# EAGLE board humanoid-9 (EAGLE 7.2.0)
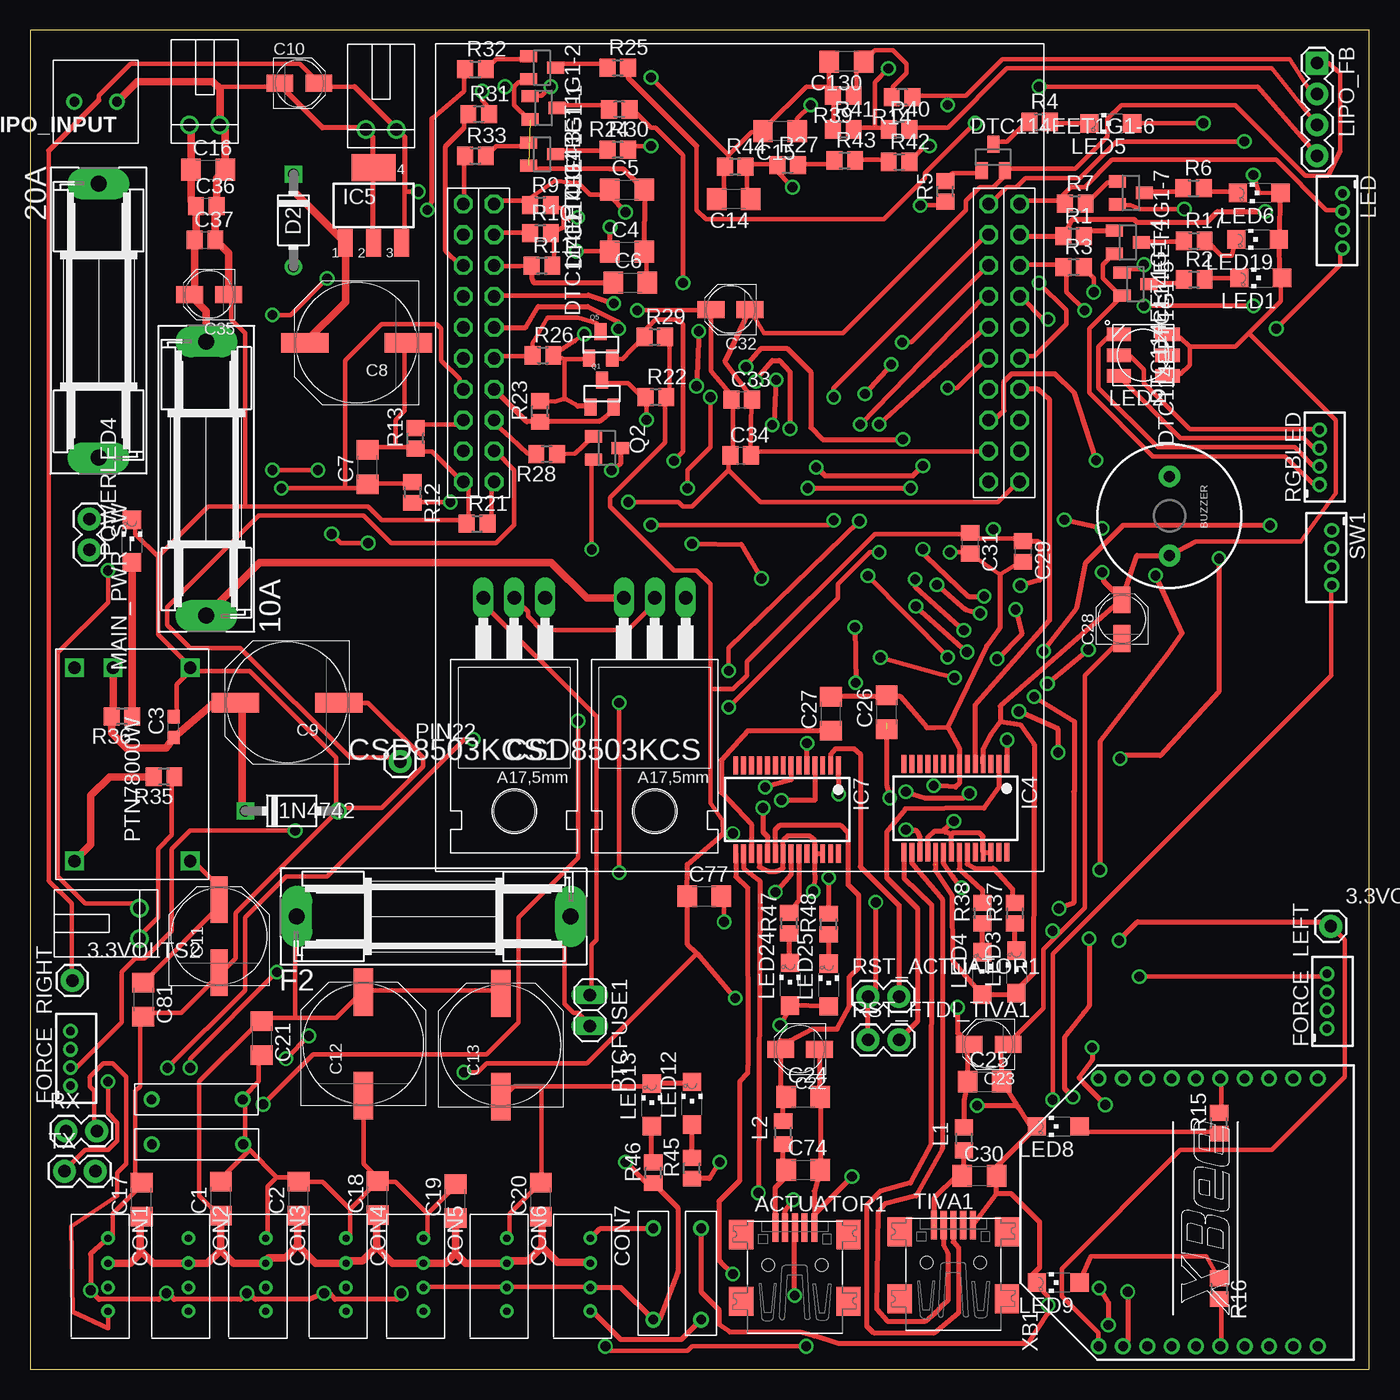
[diagram p0: board, top side]
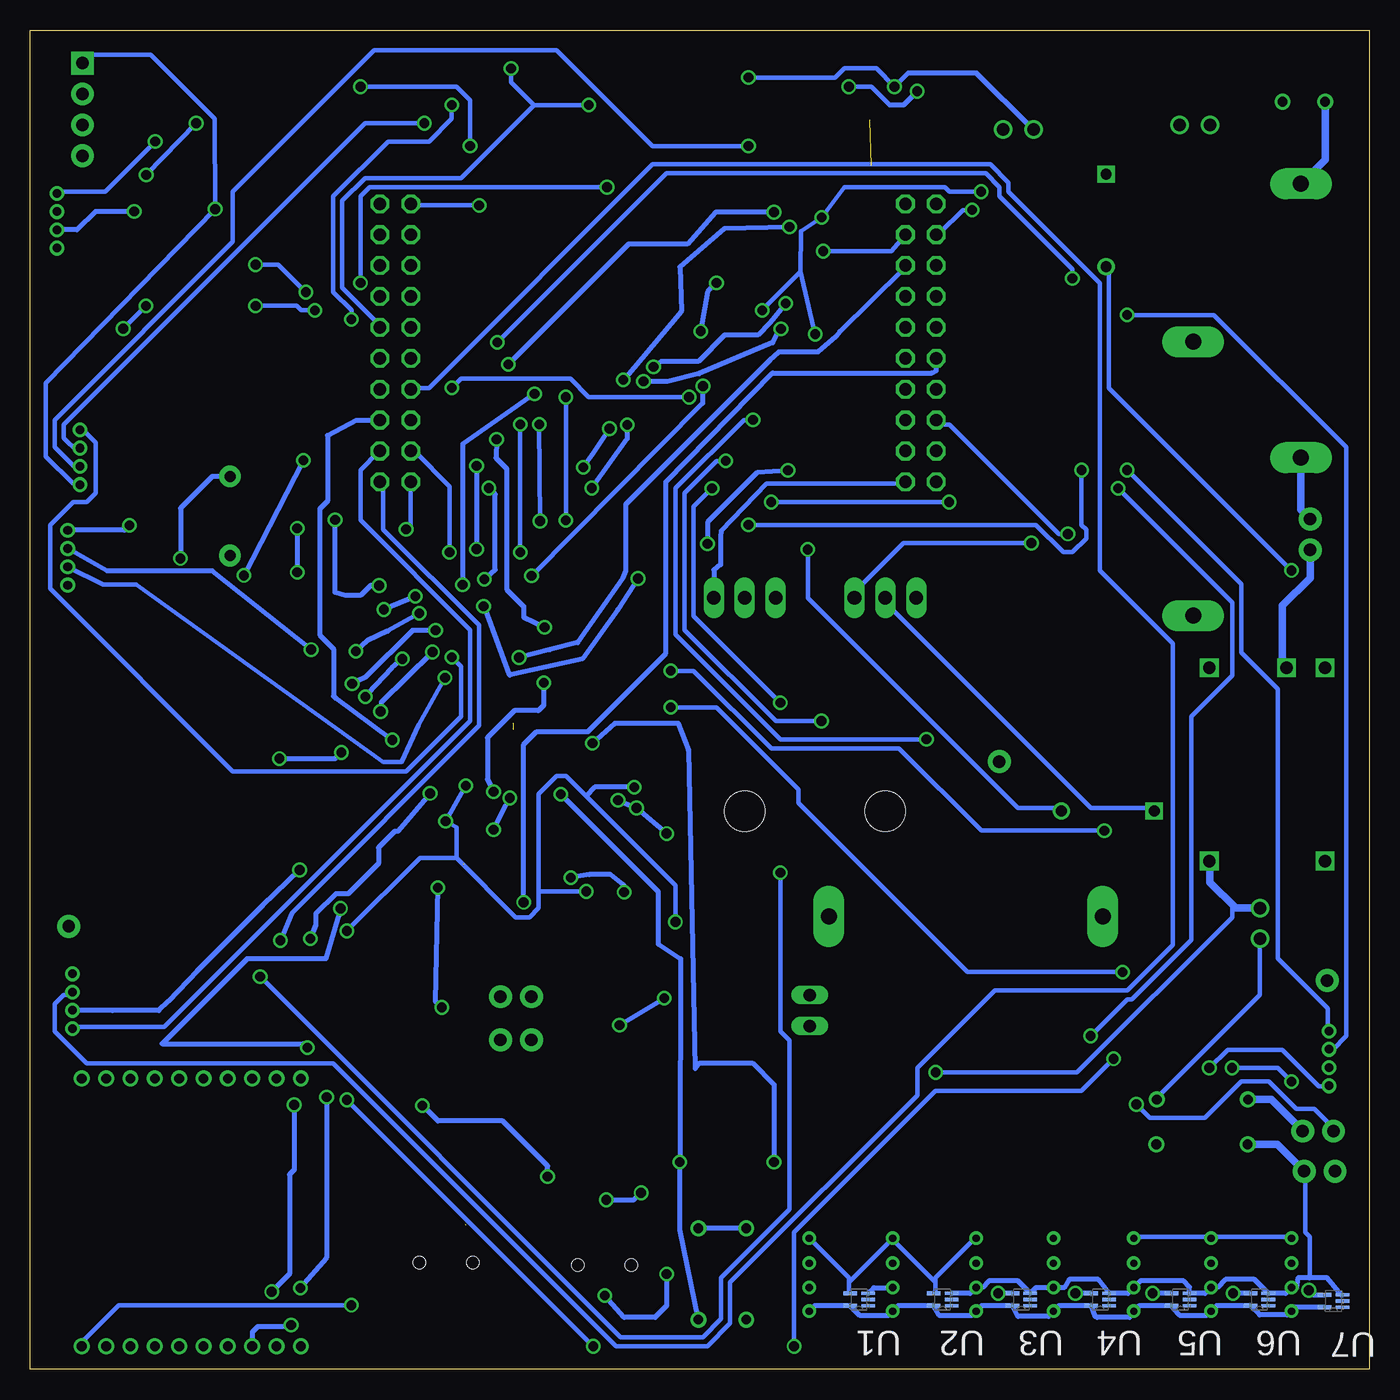
[diagram p1: board, bottom side, seen from below]

Size 110 x 110 mm. Coordinates in mm from the lower left corner, seen from the top.
Outline: 0,0 110,0 110,110 0,110 0,0
Copper layers (1*16): Top 0.035mm / dielectric 1.5mm / Bottom 0.035mm
Design rules "default *": minimum track width 10mil, minimum drill 0.5mm, track to track 0.4mm, track to pad 8mil, pad to pad 8mil, via to via 8mil, smd to smd 8mil, copper to edge 40mil, drill to drill 8mil, minimum pad ring 10mil, minimum via ring 8mil, stop-mask expansion 4mil, vias tented up to drill 0mil, thermal gap 10mil
Net classes: 0 default: width 0.35 mm

## Footprints (pad centres in the part's own frame; a part is rotated, then mirrored left to right if it is on the bottom)
DO41-3 = drill 0.9: A 3.81,0 | drill 0.9 square: C -3.81,0
2PINRIGHT = drill 1.02: P$1 0,0; P$2 2.5,0
1X01 = drill 1.016 pad 1.88: 1 0,0
SH22,5 = drill 1.321 pad 2.54 long: 1 -11.252,0; 2 11.252,0
USB-MINIB = smd 0.5 x 2.308: D+ 0,4.064; D- -0.8,4.064; GND 1.6,4.064; ID 0.8,4.064; VBUS -1.6,4.064 | smd 2 x 2.4: GND1 -4.4,-2; GND2 -4.4,3.5; GND3 4.4,3.5; GND4 4.4,-2 | hole 1: -2.2,1; 2.2,1
BUZZER-12MM = drill 0.9 pad 1.778: + 3.25,0; - -3.25,0
C1206 = smd 1.6 x 1.8: 1 -1.4,0; 2 1.4,0
C1608 = smd 1.1 x 1: 1 -0.85,0; 2 0.85,0
PANASONIC_G = smd 3.9 x 1.6: + 4.25,0; - -4.25,0
PANASONIC_B = smd 2.2 x 1.4: + 1.6,0; - -1.6,0
PANASONIC_E = smd 3.8 x 1.4: + 3,0; - -3,0
C0805 = smd 1.3 x 1.5: 1 -0.85,0; 2 0.85,0
B4B-ZR = drill 0.6: 1 7.95,-1.75; 2 6,-1.75; 3 4,-1.75; 4 1.95,-1.75
TO220 = drill 1.118 long: 1 -2.54,-6.35; 2 0,-6.35; 3 2.54,-6.35 | hole 3.302: 0,11.176
SOT23 = smd 1 x 1.4: 1 -0.95,-1.1; 2 0.95,-1.1; 3 0,1.1
B4B-ZR' = drill 0.7 pad 1.1: 1 -2.25,0; 2 -0.75,0; 3 0.75,0; 4 2.25,0
SSOP28 = smd 0.4 x 1.5: 1 -4.225,-3.625; 2 -3.575,-3.625; 3 -2.925,-3.625; 4 -2.275,-3.625; 5 -1.625,-3.625; 6 -0.975,-3.625; 7 -0.325,-3.625; 8 0.325,-3.625; 9 0.975,-3.625; 10 1.625,-3.625; 11 2.275,-3.625; 12 2.925,-3.625; 13 3.575,-3.625; 14 4.225,-3.625; 15 4.225,3.625; 16 3.575,3.625; 17 2.925,3.625; 18 2.275,3.625; 19 1.625,3.625; 20 0.975,3.625; 21 0.325,3.625; 22 -0.325,3.625; 23 -0.975,3.625; 24 -1.625,3.625; 25 -2.275,3.625; 26 -2.925,3.625; 27 -3.575,3.625; 28 -4.225,3.625
SOT223 = smd 1.219 x 2.235: 1 -2.311,-3.099; 2 0,-3.099; 3 2.311,-3.099 | smd 3.6 x 2.2: 4 0,3.099
L0805 = smd 1.3 x 1.5: 1 -0.95,0; 2 0.95,0
CHIPLED_1206 = smd 1.5 x 1.5: A 0,-1.75; C 0,1.75
RGBLED5050 = smd 2 x 1.1: 1 -2,1.7; 2 -2,0; 3 -2,-1.7; 4 2,-1.7; 5 2,0; 6 2,1.7
1X04 = drill 1.016 pad 1.88 square: 1 0,0 | drill 1.016 pad 1.88: 2 2.54,0; 3 5.08,0; 4 7.62,0
ED350V-02P = drill 0.8: P$1 0,0; P$2 3.5,0
1X02 = drill 1.016 pad 1.88: 1 0,0; 2 2.54,0
1X02' = drill 1.016 long: 1 -1.27,0; 2 1.27,0
R0805 = smd 1.3 x 1.5: 1 -0.85,0; 2 0.85,0
SOT50P160X60-5N = smd 1.118 x 0.254: 1 -0.737,0.508; 2 -0.737,0; 3 -0.737,-0.508 | smd 1.118 x 0.305: 4 0.737,-0.508; 5 0.737,0.508
TIVA = drill 1.02 octagon: P$1 0,0; P$2 2.54,0; P$3 5.08,0; P$4 7.62,0; P$5 10.16,0; P$6 12.7,0; P$7 15.24,0; P$8 17.78,0; P$9 20.32,0; P$10 22.86,0; P$11 0,2.54; P$12 2.54,2.54; P$13 5.08,2.54; P$14 7.62,2.54; P$15 10.16,2.54; P$16 12.7,2.54; P$17 15.24,2.54; P$18 17.78,2.54; P$19 20.32,2.54; P$20 22.86,2.54; P$21 0,43.18; P$22 2.54,43.18; P$23 5.08,43.18; P$24 7.62,43.18; P$25 10.16,43.18; P$26 12.7,43.18; P$27 15.24,43.18; P$28 17.78,43.18; P$29 20.32,43.18; P$30 22.86,43.18; P$31 0,45.72; P$32 2.54,45.72; P$33 5.08,45.72; P$34 7.62,45.72; P$35 10.16,45.72; P$36 12.7,45.72; P$37 15.24,45.72; P$38 17.78,45.72; P$39 20.32,45.72; P$40 22.86,45.72
PTN78000W = drill 1.02 square: P1 1.52,11.045; P2 1.52,4.705; P3 1.52,1.525; P4 17.4,1.52; P5 17.4,11.045
V18ZA2P = drill 0.8: P$1 0,0; P$2 7.5,0
XBEE = drill 0.8 pad 1.27: 1 -11,9; 2 -11,7; 3 -11,5; 4 -11,3; 5 -11,1; 6 -11,-1; 7 -11,-3; 8 -11,-5; 9 -11,-7; 10 -11,-9; 11 11,-9; 12 11,-7; 13 11,-5; 14 11,-3; 15 11,-1; 16 11,1; 17 11,3; 18 11,5; 19 11,7; 20 11,9

## Placement (x,y rotation side)
1N4742  [DO41-3]  21.47,45.87 0 top
3.3V1  2PINRIGHT  [2PINRIGHT]  27.56,101.85 0 top
3.3VOLTS1  M01PTH  [1X01]  106.86,36.39 0 top
3.3VOLTS2  M01PTH  [1X01]  3.45,31.93 0 top
5V1  2PINRIGHT  [2PINRIGHT]  8.97,35.38 90 top
10A  FUSESH22,5  [SH22,5]  14.45,73.16 90 top
20A  FUSESH22,5  [SH22,5]  5.6,86.14 270 top
ACTUATOR1  [USB-MINIB]  62.81,7.56 0 top
BUZZER  BUZZERPTH  [BUZZER-12MM]  93.6,70.1 270 top
C1  100nF  [C1206]  15.65,14 90 top
C2  100nF  [C1206]  22.03,14 90 top
C3  2.2uF  [C1608]  11.76,52.75 90 top
C4  0.1uF  [C1206]  49.02,91.82 0 top
C5  0.1uF  [C1206]  49.02,96.9 0 top
C6  0.1uF  [C1206]  49.28,89.28 0 top
C7  0.1uF  [C1206]  27.71,74.12 90 top
C8  220uF 25V  [PANASONIC_G]  26.8,84.33 180 top
C9  470uF 25V  [PANASONIC_G]  21.09,54.77 180 top
C10  22uF 10V  [PANASONIC_B]  22.1,105.66 0 top
C11  100uF 10V  [PANASONIC_E]  15.51,35.57 90 top
C12  220uF 25V  [PANASONIC_G]  27.36,26.73 90 top
C13  220uF 25V  [PANASONIC_G]  38.65,26.62 90 top
C14  100nF  [C1206]  57.78,96.14 180 top
C15  100nF  [C1206]  61.59,101.73 180 top
C16  100nF  [C1206]  14.61,98.55 0 top
C17  100nF  [C1206]  9.13,13.93 90 top
C18  100nF  [C1206]  28.54,14.06 90 top
C19  100nF  [C1206]  34.92,13.8 90 top
C20  100nF  [C1206]  41.94,13.93 90 top
C21  100nF  [C1206]  18.99,27.2 270 top
C22  4.7uF 10V  [PANASONIC_B]  63.25,26.29 180 top
C23  4.7uF 10V  [PANASONIC_B]  78.74,26.67 180 top
C24  100nF  [C1206]  63.5,22.35 0 top
C25  100nF  [C1206]  78.42,23.62 0 top
C26  100nF  [C1206]  70.36,53.98 90 top
C27  100nF  [C1206]  65.79,53.85 90 top
C28  10uF 16V  [PANASONIC_B]  89.7,61.62 90 top
C29  0.1uF  [C0805]  81.56,67.18 270 top
C30  10nF  [C1206]  77.98,15.88 0 top
C31  0.1uF  [C0805]  77.22,67.87 270 top
C32  10uF 16V  [PANASONIC_B]  57.52,87.06 180 top
C33  0.1uF  [C0805]  58.45,79.65 0 top
C34  0.1uF  [C0805]  58.37,75.08 0 top
C35  10uF 16V  [PANASONIC_B]  14.68,88.29 180 top
C36  0.1uF  [C0805]  14.45,95.55 0 top
C37  0.1uF  [C0805]  14.35,92.79 0 top
C74  10nF  [C1206]  63.5,16.38 0 top
C77  100nF  [C1206]  55.37,38.86 0 top
C81  100nF  [C1206]  9.27,30.35 270 top
C130  100nF  [C1206]  67.06,107.44 180 top
CON1  B4B-ZR  [B4B-ZR]  8.13,12.7 270 top
CON2  B4B-ZR  [B4B-ZR]  14.73,12.7 270 top
CON3  B4B-ZR  [B4B-ZR]  21.08,12.7 270 top
CON4  B4B-ZR  [B4B-ZR]  27.69,12.7 270 top
CON5  B4B-ZR  [B4B-ZR]  34.04,12.7 270 top
CON6  B4B-ZR  [B4B-ZR]  40.89,12.7 270 top
CON7  B4B-ZR  [B4B-ZR]  47.75,12.7 270 top
CSD8503KCS  BUZ20  [TO220]  51.31,57.02 180 top
CSD8503KCS1  BUZ20  [TO220]  39.75,57.02 180 top
D2  1N5817  [DO41-3]  21.61,94.39 270 top
DTC114EET1G1-1  [SOT23]  42.16,103.63 270 top
DTC114EET1G1-2  [SOT23]  42.04,106.93 270 top
DTC114EET1G1-3  [SOT23]  42.04,99.82 270 top
DTC114EET1G1-4  [SOT23]  90.17,92.58 270 top
DTC114EET1G1-5  [SOT23]  90.81,89.15 270 top
DTC114EET1G1-6  [SOT23]  79.12,99.57 0 top
DTC114EET1G1-7  [SOT23]  90.42,96.65 270 top
F2  FUSESH22,5  [SH22,5]  33.13,37.2 0 top
FITPC  2PINRIGHT  [2PINRIGHT]  13.08,102.23 0 top
FORCE_LEFT  B4B-ZR  [B4B-ZR']  106.55,30.23 90 top
FORCE_RIGHT  B4B-ZR  [B4B-ZR']  3.3,25.53 90 top
IC4  FT232RL  [SSOP28]  76.01,46.09 180 top
IC5  LM2936MP-3.3  [SOT223]  28.19,95.63 0 top
IC7  FT232RL  [SSOP28]  62.18,45.98 180 top
L1  33 mH 1.5A  [L0805]  76.71,18.92 90 top
L2  33 mH 1.5A  [L0805]  61.85,19.43 90 top
LED  B4B-ZR  [B4B-ZR']  107.82,94.36 270 top
LED1  [CHIPLED_1206]  101.09,89.66 90 top
LED2  RGBLED5050  [RGBLED5050]  91.44,83.31 180 top
LED3  [CHIPLED_1206]  81.03,32.64 0 top
LED4  [CHIPLED_1206]  78.23,32.51 0 top
LED5  [CHIPLED_1206]  88.77,102.36 90 top
LED6  [CHIPLED_1206]  100.97,96.65 90 top
LED8  [CHIPLED_1206]  84.45,19.94 90 top
LED9  [CHIPLED_1206]  84.45,7.11 90 top
LED12  [CHIPLED_1206]  54.36,21.84 0 top
LED13  [CHIPLED_1206]  51.05,21.72 0 top
LED19  [CHIPLED_1206]  100.84,92.84 90 top
LED24  [CHIPLED_1206]  62.42,31.62 0 top
LED25  [CHIPLED_1206]  65.6,31.56 0 top
LIPO_FB  [1X04]  105.73,107.31 270 top
LIPO_INPUT  ST02-3.5MM  [ED350V-02P]  7.11,104.14 180 top
MAIN_PWR_SW  [1X02]  4.84,69.85 270 top
PIN22  M01PTH  [1X01]  30.39,49.91 0 top
POWERLED4  [CHIPLED_1206]  8.34,68.04 0 top
PTCFUSE1  [1X02']  45.97,29.46 270 top
Q1  MOSFET-NCHANNELBSS138  [SOT23]  46.97,80.15 0 top
Q2  [SOT23]  47.37,75.69 270 top
Q5  MOSFET-NCHANNELBSS138  [SOT23]  46.86,84.16 0 top
R1  10K  [R0805]  85.72,93.09 0 top
R2  330E  [R0805]  95.63,89.53 0 top
R3  10K  [R0805]  85.72,90.55 0 top
R4  330E  [R0805]  82.93,102.49 0 top
R5  10K  [R0805]  75.18,96.77 90 top
R6  330E  [R0805]  95.57,97.03 0 top
R7  10K  [R0805]  85.85,95.76 0 top
R9  10K  [R0805]  41.91,95.63 0 top
R10  10K  [R0805]  41.91,93.34 0 top
R11  10K  [R0805]  42.04,90.68 0 top
R12  10K  [R0805]  31.39,72.03 270 top
R13  1M  [R0805]  31.65,76.48 90 top
R14  10k  [R0805]  71.63,104.52 180 top
R15  330R  [R0805]  97.66,20.19 90 top
R16  330R  [R0805]  97.66,6.6 270 top
R17  330E  [R0805]  95.63,92.71 0 top
R21  1M  [R0805]  36.7,69.47 0 top
R22  10K  [R0805]  51.4,79.88 0 top
R23  10K  [R0805]  41.87,78.69 90 top
R24  330E  [R0805]  48.39,103.5 180 top
R25  330E  [R0805]  48.26,106.93 0 top
R26  10K  [R0805]  42.12,83.3 0 top
R27  10k  [R0805]  62.23,98.93 0 top
R28  10k  [R0805]  42.42,75.18 180 top
R29  10K  [R0805]  51.31,84.81 0 top
R30  330E  [R0805]  48.26,100.2 0 top
R31  10K  [R0805]  36.83,103.12 0 top
R32  10K  [R0805]  36.58,106.81 0 top
R33  10K  [R0805]  36.58,99.69 0 top
R35  21K  [R0805]  10.99,48.67 180 top
R36  1k  [R0805]  7.53,53.62 180 top
R37  270E  [R0805]  80.9,37.47 90 top
R38  270E  [R0805]  78.23,37.47 90 top
R39  10k  [R0805]  66.8,104.65 180 top
R40  30k  [R0805]  71.37,101.85 0 top
R41  10k  [R0805]  66.8,101.85 0 top
R42  30k  [R0805]  71.37,99.19 0 top
R43  30k  [R0805]  66.93,99.31 0 top
R44  10k  [R0805]  57.91,98.81 0 top
R45  330E  [R0805]  54.36,16.51 90 top
R46  330E  [R0805]  51.18,16.13 90 top
R47  270E  [R0805]  62.36,36.64 90 top
R48  270E  [R0805]  65.6,36.58 90 top
RGBLED  B4B-ZR  [B4B-ZR']  105.92,74.93 90 top
RST_ACTUATOR1  [1X02]  68.83,30.61 0 top
RST_FTDI_TIVA1  [1X02]  68.83,27.05 0 top
RX  [1X02]  2.92,19.56 0 top
SW1  B4B-ZR  [B4B-ZR']  106.93,66.67 270 top
TIVA1  [USB-MINIB]  75.84,7.77 0 top
TX  [1X02]  2.79,16.26 0 top
U1  TPD2E2U06  [SOT50P160X60-5N]  41.91,5.71 180 bottom
U2  TPD2E2U06  [SOT50P160X60-5N]  35.05,5.71 180 bottom
U3  TPD2E2U06  [SOT50P160X60-5N]  28.57,5.71 180 bottom
U4  TPD2E2U06  [SOT50P160X60-5N]  22.1,5.71 180 bottom
U5  TPD2E2U06  [SOT50P160X60-5N]  15.49,5.71 180 bottom
U6  TPD2E2U06  [SOT50P160X60-5N]  9.02,5.71 180 bottom
U7  TPD2E2U06  [SOT50P160X60-5N]  2.92,5.59 180 bottom
U$1  TIVA  [TIVA]  81.28,72.9 90 top
U$4  PTN78000WTHROUGHHOLE  [PTN78000W]  2.09,59.15 270 top
V8ZA2P-1  V18ZA2P  [V18ZA2P]  17.45,22.15 180 top
V8ZA2P-2  V18ZA2P  [V18ZA2P]  17.48,18.47 180 top
V8ZA2P-3  V18ZA2P  [V18ZA2P]  55.12,4.06 90 top
V8ZA2P-4  V18ZA2P  [V18ZA2P]  51.18,4.06 90 top
XB1  XBEE  [XBEE]  96.78,12.88 90 top

## Library data of the parts
1N4742 D2 = gm-diodes; OC_NEWARK: unknown
3.3V1 5V1 FITPC = jst 2.5mm; OC_NEWARK: unknown
3.3VOLTS1 3.3VOLTS2 PIN22 = SparkFun-Connectors
10A 20A F2 = fuse; OC_FARNELL: unknown; OC_NEWARK: unknown
ACTUATOR1 C30 C74 C77 C81 LED1-LED6 LED12 LED13 LED19 LED24 LED25 POWERLED4 TIVA1 = adafruit; OC_NEWARK: unknown
BUZZER = SparkFun-Electromechanical
C1 C2 C14-C21 C24-C27 C130 = adafruit; MANUFACTURER: KEMET; OC_NEWARK: unknown; PARTNO: C1206C104K5RACTU
C3 = resistor; MANUFACTURER: TDK; MOUSER_PARTNO: 810-C1608X7R1A225K; PARTNO: C1608X7R1A225K080AC; SELLER: MOUSER
C4-C7 = adafruit; MANUFACTURER: Kemet; MOUSER_PARTNO: 80-C0805C104M5R; OC_NEWARK: unknown; PARTNO: C0805C104M5RACTU; SELLER: MOUSER
C8 C12 C13 = resistor; MANUFACTURER: PANASONIC ELECTRONIC COMPONENTS; MOUSER_PARTNO: 667-EEE-1EA221P; OC_NEWARK: unknown; PARTNO: EEE-1EA221P; SELLER: MOUSER ELECTRONICS
C9 = resistor; MANUFACTURER: PANASONIC ELECTRONIC COMPONENTS; OC_NEWARK: unknown; PARTNO: EEEFK1E471AP
C10 = resistor; MANUFACTURER: PANASONIC ELECTRONIC COMPONENTS; OC_NEWARK: unknown; PARTNO: EEEFK1A220AR
C11 = resistor; MANUFACTURER: Panasonic; MOUSER_PARTNO: 667-EEE-HA1A101P; OC_NEWARK: unknown; PARTNO: EEE-HA1A101P; SELLER: MOUSER ELECTRONICS
C22 C23 = resistor; MANUFACTURER: Panasonic; MOUSER_PARTNO: 667-10SVP4R7M; OC_NEWARK: unknown; PARTNO: 10SVP4R7M; SELLER: MOUSER
C28 C29 C31-C37 R15 R16 R28 = resistor
CON1-CON7 = jst_herkulex; MF: FARNELL; MPN: B4B-ZR(LF)(SN); OC_NEWARK: unknown
CSD8503KCS CSD8503KCS1 = transistor-fet; OC_NEWARK: unknown
DTC114EET1G1-1-DTC114EET1G1-7 = semicon-smd-ipc; OC_NEWARK: unknown
FORCE_LEFT FORCE_RIGHT LED RGBLED SW1 = con-jst; MF: FARNELL; MPN: B4B-ZR(LF)(SN); OC_FARNELL: 1830916; OC_NEWARK: unknown
IC4 IC7 = ftdichip; MPN: FT232RL; OC_FARNELL: 1146032; OC_NEWARK: unknown
IC5 = national-semiconductor; MF: NATIONAL SEMICONDUCTOR; MPN: LM2936MP-3.3/NOPB; OC_FARNELL: 1469062; OC_NEWARK: unknown
L1 L2 = rcl-2; MANUFACTURER: Laird Technologies; MOUSER_PARTNO: 875-MI0805K400R-10; OC_NEWARK: unknown; PARTNO: MI0805K400R-10; SELLER: MOUSER ELECTRONICS
LED8 LED9 = adafruit
LIPO_FB MAIN_PWR_SW RST_ACTUATOR1 RST_FTDI_TIVA1 RX TX = SparkFun; OC_NEWARK: unknown
LIPO_INPUT = con-dinkle; OC_NEWARK: unknown
PTCFUSE1 = pinhead; OC_NEWARK: unknown
Q1 Q5 = SparkFun-DiscreteSemi; OC_NEWARK: unknown; PROD_ID: TRANS-00830
Q2 = semicon-smd-ipc
R1-R7 R9-R14 R17 R21-R27 R29-R33 R35-R48 = resistor; OC_NEWARK: unknown
U1-U7 = ti_tpd2e2u06; MPN: TPD2E001IDRLRQ1; OC_FARNELL: -; OC_NEWARK: 55R7553; PACKAGE: SOT-23-5; SUPPLIER: Texas Instruments
U$1 = tiva; OC_NEWARK: unknown
U$4 = PTN78000W
V8ZA2P-1-V8ZA2P-4 = SparkFun-DiscreteSemi; OC_NEWARK: unknown
XB1 = maxstream; MPN: XBP24-Z7UIT-004; OC_FARNELL: 1751799; OC_NEWARK: 34R5507

## Nets
3.3V: 3.3V1.P$2 3.3VOLTS1.1 3.3VOLTS2.1 C10.+ C32.+ C33.1 C34.1 IC5.3 Q1.1 Q5.1 R9.2 R10.2 R11.2 R12.2 R23.2 R26.2 U$1.P$1 XB1.1
5V: 5V1.P$2 BUZZER.+ C11.+ C28.+ C29.1 C31.1 C77.1 C81.1 D2.A IC4.4 IC4.19 IC7.4 IC7.19 LED1.A LED2.1 LED2.3 LED3.A LED4.A LED5.A LED6.A LED19.A LED24.A LED25.A R22.2 R29.2 U$1.P$11 U$4.P5
GND: 1N4742.A 3.3V1.P$1 5V1.P$1 ACTUATOR1.GND C1.2 C2.2 C3.2 C4.2 C5.2 C6.2 C7.2 C8.- C9.- C10.- C11.- C12.- C13.- C14.2 C15.2 C16.2 C17.2 C18.2 C19.2 C20.2 C21.2 C22.- C23.- C24.2 C25.2 C26.2 C27.2 C28.- C29.2 C30.2 C31.2 C32.- C33.2 C34.2 C35.- C36.2 C37.2 C74.2 C77.2 C81.2 C130.2 CON1.4 CON2.4 CON3.4 CON4.4 CON5.4 CON6.4 CON7.4 DTC114EET1G1-1.2 DTC114EET1G1-2.2 DTC114EET1G1-3.2 DTC114EET1G1-4.2 DTC114EET1G1-5.2 DTC114EET1G1-6.2 DTC114EET1G1-7.2 FITPC.P$2 IC4.7 IC4.18 IC4.21 IC4.25 IC4.26 IC5.2 IC5.4 IC7.7 IC7.18 IC7.21 IC7.25 IC7.26 LED8.C LED9.C LED12.C LED13.C LIPO_FB.1 LIPO_INPUT.P$1 POWERLED4.C Q2.2 R13.1 R21.1 R35.1 R39.2 R41.1 R44.1 RGBLED.1 TIVA1.GND U1.4 U2.4 U3.4 U4.4 U5.4 U6.4 U7.4 U$1.P$12 U$1.P$31 U$4.P1 V8ZA2P-1.P$1 V8ZA2P-2.P$1 V8ZA2P-3.P$2 V8ZA2P-4.P$2 XB1.10
HX_RX: CON1.1 CON2.1 CON3.1 CON4.1 CON5.1 CON6.1 CON7.1 IC7.1 R45.1 RX.2 U1.5 U2.5 U3.5 U4.5 U5.5 U6.5 U7.5 V8ZA2P-1.P$2 V8ZA2P-3.P$1
HX_TX: CON1.2 CON2.2 CON3.2 CON4.2 CON5.2 CON6.2 CON7.2 IC7.5 R46.1 TX.2 U1.3 U2.3 U3.3 U4.3 U5.3 U6.3 U7.3 V8ZA2P-2.P$2 V8ZA2P-4.P$1
LIPO_FB4: LIPO_FB.4 R42.2
MOSFET_CTRL1: 10A.1 CSD8503KCS.3
MOSFET_CTRL2: CSD8503KCS1.3 PTCFUSE1.1
N$1: C130.1 R14.2 R39.1
N$2: C1.1 C2.1 C12.+ C13.+ C17.1 C18.1 C19.1 C20.1 C21.1 CON1.3 CON2.3 CON3.3 CON4.3 CON5.3 CON6.3 CON7.3 F2.1
N$3: C8.+ D2.C IC5.1
N$4: IC7.22 R48.2
N$5: IC7.23 R47.2
N$6: LED24.C R47.1
N$7: C30.1 L1.1 TIVA1.VBUS
N$8: LED25.C R48.1
N$9: 20A.2 MAIN_PWR_SW.1
N$10: C23.+ C25.1 IC4.20 L1.2
N$11: IC4.15 TIVA1.D+
N$12: IC4.16 TIVA1.D-
N$13: LED3.C R37.1
N$14: 20A.1 LIPO_INPUT.P$2
N$15: LED4.C R38.1
N$16: IC4.23 R37.2
N$17: IC4.22 R38.2
N$18: LED2.5 R24.1 RGBLED.4
N$19: R27.2 R43.1
N$20: BUZZER.- Q2.3
N$21: Q2.1 R28.1
N$22: DTC114EET1G1-4.1 R1.2
N$24: LED19.C R17.2
N$25: DTC114EET1G1-4.3 R17.1
N$26: DTC114EET1G1-5.1 R3.2
N$27: LED2.6 R25.2 RGBLED.3
N$28: LED2.4 R30.2 RGBLED.2
N$29: DTC114EET1G1-1.3 R24.2
N$30: DTC114EET1G1-2.3 R25.1
N$31: DTC114EET1G1-3.3 R30.1
N$32: LED1.C R2.2
N$33: DTC114EET1G1-5.3 R2.1
N$34: C26.1 IC4.17
N$35: IC4.2 RST_FTDI_TIVA1.2
N$36: DTC114EET1G1-6.1 R5.2
N$37: DTC114EET1G1-1.1 R31.2
N$38: DTC114EET1G1-2.1 R32.2
N$39: DTC114EET1G1-3.1 R33.2
N$40: LED5.C R4.2
N$41: DTC114EET1G1-6.3 R4.1
N$42: DTC114EET1G1-7.1 R7.2
N$43: LED6.C R6.2
N$44: DTC114EET1G1-7.3 R6.1
N$53: LED8.A R15.1
N$54: LED9.A R16.1
N$55: R15.2 XB1.15
N$56: R16.2 XB1.6
N$70: F2.2 PTCFUSE1.2
N$73: LED12.A R45.2
N$74: LED13.A R46.2
N$76: R35.2 U$4.P4
N$92: ACTUATOR1.VBUS C74.1 L2.1
N$93: C22.+ C24.1 IC7.20 L2.2
N$94: ACTUATOR1.D+ IC7.15
N$95: ACTUATOR1.D- IC7.16
N$115: C27.1 IC7.17
N$116: IC7.2 RST_ACTUATOR1.2
N$337: R42.1 R43.2
N$338: LIPO_FB.3 R40.2
N$378: 10A.2 C16.1 C35.+ C36.1 C37.1 FITPC.P$1
N$381: POWERLED4.A R36.1
P2: FORCE_LEFT.1 U$1.P$2
P3: IC4.1 U$1.P$3
P4: IC4.5 U$1.P$4
P5: C14.1 R27.1 R44.2 U$1.P$5
P6: C15.1 R40.1 R41.2 U$1.P$6
P7: LIPO_FB.2 R14.1 U$1.P$7
P8: LED.4 R3.1 U$1.P$8
P9: LED.3 R1.1 U$1.P$9
P10: LED.2 R7.1 U$1.P$10
P13: FORCE_LEFT.2 U$1.P$13
P14: FORCE_LEFT.3 U$1.P$14
P15: FORCE_LEFT.4 U$1.P$15
P16: FORCE_RIGHT.1 U$1.P$16
P17: FORCE_RIGHT.2 U$1.P$17
P18: FORCE_RIGHT.3 U$1.P$18
P19: FORCE_RIGHT.4 U$1.P$19
P20: LED.1 R5.1 U$1.P$20
P21: CSD8503KCS.1 R21.2 U$1.P$21
P22: PIN22.1 U$1.P$22
P23: R28.2 U$1.P$23
P24: Q1.2 R23.1 U$1.P$24
P25: Q5.3 R26.1 U$1.P$25
P28: C6.1 R11.1 SW1.3 U$1.P$28
P29: C4.1 R10.1 SW1.2 U$1.P$29
P30: C5.1 R9.1 SW1.1 U$1.P$30
P33: CSD8503KCS1.1 R13.2 U$1.P$33
P34: C7.1 R12.1 SW1.4 U$1.P$34
P35: RST_ACTUATOR1.1 RST_FTDI_TIVA1.1 U$1.P$35
P38: R31.1 U$1.P$38
P39: R32.1 U$1.P$39
P40: R33.1 U$1.P$40
RX3: U$1.P$26 XB1.2
TIVA_RX: Q1.3 R22.1 TX.1
TIVA_TX: Q5.2 R29.1 RX.1
TX3: U$1.P$27 XB1.3
VCC: 1N4742.C C3.1 C9.+ CSD8503KCS1.2 CSD8503KCS.2 MAIN_PWR_SW.2 R36.2 U$4.P2

## Tracks (layer width: path | path; a pad name or v marks a point on that pad's centre or on a via)
3.3V  (via drill 0.8)
  Top 0.35: 26.62,105.38 24,105.38 C10.+ 23.62,105.75 22.12,107.25 8.25,107.25 5.62,104.62 5.62,104.25 | 30,102 3.3V1.P$2 30.38,101.62 30.75,101.25 | IC5.3 30.75,92.62 30.75,96.75 v31.88,96.75 | 1.5,100.12 1.5,40.12 3.38,38.25 3.38,32.25 3.3VOLTS2.1 | XB1.1 87.75,2.25 87.75,3 84.75,6 84.75,8.25 94.5,18 102,18 108,24 108,35.25 106.88,36.38 3.3VOLTS1.1 106.5,36.75 | R11.2 43.04,90.88 43.04,92.81 R10.2 43.81,93.82 43.81,94.5 | 43.81,94.5 43.74,95.37 R9.2 | 43.88,82.98 45.75,82.98 Q5.1 | 43.88,82.98 43.25,83.23 R26.2 | 45.75,79.12 Q1.1 | 43.88,82.98 43.88,79.73 43.12,79.49 R23.2 | v44.99,94.63 43.81,94.5 | 44.72,84.49 v45.52,85.04 | v34.5,71.25 31.5,71.25 R12.2 | v49.12,71.25 53.25,71.25 53.62,70.88 54.38,70.88 57.38,73.88 | 57.38,73.88 57.38,75 C34.1 57.75,75.38 57.75,79.5 C33.1 57.75,79.88 55.93,82.01 55.93,84.62 C32.+ 55.68,87.03 54,87 v49.88,87 | 57.38,73.88 60,71.25 79.5,71.25 81,72.75 U$1.P$1
  Top 0.406: 30,102 26.62,105.38 | 30.75,101.25 30.75,96.75 | 5.62,104.25 1.5,100.12 | 45.75,79.12 44.99,79.12 43.88,79.73 | R26.2 44.72,84.49 | v89.45,35.23 90.98,36.75 106.5,36.75
  Bottom 0.35: 46.74,90.2 46.68,93.51 v44.99,94.63 43.12,97.12 34.88,97.12 34.5,96.75 v31.88,96.75 | v45.52,85.04 46.74,90.2 | v49.12,71.25 v34.5,71.25 | v49.88,87 46.74,90.2 | v89.45,35.23 88.5,37.5 73.12,52.88 73.12,61.12 81,69 81,72.75 U$1.P$1
5V  (via drill 0.8)  (1 unrouted)
  Top 0.35: C81.1 9.38,31.88 15.75,38.25 C11.+ 15.38,38.62 15.38,39.75 13.5,41.62 U$4.P5 | v6.38,65.62 6.38,63 2.25,58.88 2.25,40.5 4.5,38.25 8.62,38.25 5V1.P$2 | 95.25,84 95.25,82.5 94.5,81.75 93.75,81.75 LED2.1 | 95.25,84 94.5,84.75 93.75,84.75 LED2.3 | v96.38,102.38 90.75,102.38 LED5.A | v100.49,98.13 100.98,96.63 LED6.A | 95.25,84 99,84 100.12,85.12 | 100.12,85.12 102.75,87.75 102.75,89.62 LED1.A | 100.12,85.12 107.25,78 107.25,72 104.41,68.01 95.78,68.01 BUZZER.+ | 79.12,68.25 77.62,68.25 77.25,68.62 C31.1 76.88,68.62 69.38,68.62 58.88,58.12 58.88,57 57.75,55.88 55.88,55.88 | 79.12,68.25 81.38,68.25 C29.1 | 79.12,68.25 v79.12,69 | R29.2 52.5,84.75 52.5,79.88 R22.2 52.12,79.88 52.12,76.12 47.62,71.62 47.62,70.88 52.88,65.62 54.75,65.62 55.88,64.5 55.88,55.88 | 55.88,55.88 55.88,46.5 56.86,45.07 56.9,44.01 | v35.62,24.38 36.75,24.38 37.5,25.12 45.75,25.12 54.76,34.14
  Top 0.406: IC7.4 64.46,46.74 v61.72,46.74 | v57.72,44.01 56.9,44.01 56.58,43.69 53.98,41.47 C77.1 53.97,34.93 54.76,34.14 v57.91,30.48 | v61.59,28.26 62.51,29.72 LED24.A LED25.A | 74.39,41.49 IC4.19 | 74.36,41.47 74.36,40.96 75.75,38.86 75.82,33.56 LED4.A 80.9,30.76 LED3.A 81.03,31.11 82.42,32.51 82.49,51.31 81.34,52.96 79.69,53.21 | IC4.4 78.3,50.98 78.3,50.99 78.93,52.13 79.69,53.21 | C28.+ 79.69,54.48 79.69,53.21 | C28.+ 90.92,66.85 BUZZER.+ | LED19.A 103.1,93.09 | LED6.A LED19.A | LED1.A 102.72,89.79 LED19.A | C29.1 82.78,68.03 82.93,67.88 82.93,64.83 v81.34,64.39 | v84.96,69.79 v88.08,69.09 | v88.08,65.47 88.2,64.72 C28.+ | v60.2,46.1 60.2,44.13 60.58,43.75 60.58,42.38 IC7.19
  Bottom 0.35: v6.38,65.62 21.38,80.62 21.38,90.38 D2.A | v100.49,98.13 v96.38,102.38 | v79.12,69 78.75,69.38 78.75,72.75 U$1.P$11 | v35.62,24.38 24,24.38 11.25,37.12 11.25,37.88 10.96,37.88
  Bottom 0.406: v61.72,46.74 61.4,46.61 v60.2,46.1 59.31,45.34 v57.72,44.01 | v57.91,30.48 v61.59,28.26 | v81.34,64.39 82.04,64.39 82.87,63.56 84.14,63.56 84.96,63.82 v84.96,69.79 | v88.08,69.09 v88.08,65.47
  Bottom 0.61: 5V1.P$2 10.96,37.88 13.08,40.01 13.08,41.7 U$4.P5
GND  (via drill 0.8)  (1 unrouted)
  Top 0.35: 89.62,88.12 88.12,89.62 88.12,90.75 88.88,91.5 DTC114EET1G1-4.2 | v94.81,95.32 91.19,95.32 90.38,95.62 89.62,95.62 DTC114EET1G1-7.2 | 89.62,88.12 87,85.5 87,80.25 92.25,75 103.12,75 105.75,72.38 RGBLED.1 | 89.62,88.12 DTC114EET1G1-5.2 | C29.2 81.38,66.38 79.66,65.3 C31.2 76.88,67.12 v75.57,67.12 | v57,36.75 57,38.62 C77.2 | 75.4,52.75 78.58,59.42 | v64.32,39.25 64.51,40.37 | C6.2 50.62,91.12 50.37,91.6 C4.2 | 47.62,98.62 41.25,98.62 DTC114EET1G1-3.2 | 59.19,75.38 59.25,79.5 C33.2 59.25,79.88 | C32.- 60.27,85.12 66.75,85.12 76.88,95.25 76.88,96 78,97.12 79.12,97.12 79.88,97.88 79.88,98.25 DTC114EET1G1-6.2 80.25,98.62 85.88,98.62 88.5,101.25 88.5,102.75 89.62,103.88 99,103.88 104.76,98.05 106.63,98.05 107.62,100.12 107.62,106.5 106.7,107.3 LIPO_FB.1 | 59.19,75.38 78.31,75.38 U$1.P$12 | 59.19,75.38 C34.2 | R41.1 66,102 66,104.62 R39.2 | 65.62,105.38 65.62,105 R39.2 | 65.62,105.38 65.62,107.25 C130.2 | C14.2 56.62,96.38 57,96.75 57,98.62 R44.1 57.38,99 57.38,99.75 | 57.38,99.75 59.25,101.62 60,101.62 C15.2 60.38,102 63.75,105.38 65.62,105.38 | 65.62,105.38 R39.2 | 28.12,92.62 IC5.2 | 28.12,98.62 IC5.4 28.12,99 | 15.58,105.2 15.75,105.38 20.25,105.38 C10.- 20.62,105.38 | 39.75,105.38 39.75,103.88 40.88,102.75 DTC114EET1G1-1.2 | 39.75,105.38 40.12,105.75 40.88,105.75 DTC114EET1G1-2.2 | v39,105.38 39.75,105.38 | 27.38,102 3.3V1.P$1 | 27.75,101.62 28.12,101.25 | v51,106.12 57.38,99.75 | 30,75.75 27.75,75.75 C7.2 | 30,75.75 31.5,75.75 R13.1 31.88,75.38 33,75.38 35.25,73.12 U$1.P$31 35.62,72.75 36,72.38 36,69.75 R21.1 35.62,69.75 28.88,69.75 27.75,70.88 17.62,70.88 | 30,75.75 30,78 30.75,78.75 30.75,84 C8.-
  Top 0.35: C3.2 12,53.62 12,56.25 13.12,57.38 U$4.P1 | 10.5,66.75 8.62,68.62 8.62,69.75 POWERLED4.C | 10.5,66.75 10.5,60.38 13.12,57.75 U$4.P1 | v46.12,67.35 46.12,74.62 Q2.2 | C9.- 25.5,54.75 27.75,54.75 32.25,50.25 32.25,49.5 28.88,46.12 25.5,46.12 1N4742.A | U$4.P1 13.5,57.38 18,57.38 25.12,50.25 25.12,46.12 1N4742.A | 17.62,70.88 14.62,70.88 10.5,66.75 | 17.62,70.88 17.62,85.12 16.5,86.25 16.5,88.12 C35.- | R35.1 11.62,48.38 11.62,43.88 10.5,42.75 10.5,37.12 9,35.62 5V1.P$1 | CON1.4 6.75,10.88 6.75,12.75 9,15 C17.2 9,15.38 8.62,15.75 8.62,22.88 9,23.25 9,28.88 C81.2 9.38,29.25 12.38,29.25 15.38,32.25 C11.- 15.75,32.62 16.88,33.75 16.88,37.5 25.12,45.75 1N4742.A | C21.2 18.75,25.5 18.75,23.62 17.62,22.5 V8ZA2P-1.P$1 17.62,22.12 17.62,18.75 V8ZA2P-2.P$1 17.62,18.38 18,18 | 20.25,15.75 21.75,15.75 C2.2 22.12,15.38 24,15.38 26.25,13.12 | 18,18 20.25,15.75 | 18,18 15.75,15.75 C1.2 | 20.25,15.75 19.5,15 19.5,10.88 CON3.4 | 42,23.25 39.75,23.25 39,22.5 C13.- | 42,23.25 51,23.25 LED13.C | CON6.4 39.38,10.88 39.38,12.75 41.62,15 C20.2 42,15.38 42,23.25 | 32.62,12.75 34.88,15 C19.2 | 32.62,12.75 32.62,10.88 CON5.4 | 32.62,12.75 30,15.38 28.88,15.38 C18.2 | 26.25,13.12 26.25,10.88 CON4.4 | 26.25,13.12 28.5,15.38 C18.2 | C12.- 27.38,22.12 27.38,16.88 28.5,15.75 C18.2 | 84.38,35.62 83.25,34.5 83.25,29.62 80.62,27 C23.- | 84.38,35.62 86.62,37.88 86.62,57 C28.- | v83.62,5.25 83.62,5.78 83.62,6 82.88,6.75 LED9.C | 84.38,35.62 v84,36 | 50.38,97.02 50.5,97.15 C5.2 50.38,97.02
  Top 0.406: IC4.18 73.74,43.7 74.3,44.2 74.93,44.2 | IC4.21 75.69,43.95 | 75.69,43.95 75.18,44.13 74.93,44.2 | IC4.26 IC4.25 78.29,43.76 77.98,44.07 75.81,44.07 75.69,43.95 | C22.- 64.85,22.41 C24.2 C74.2 64.41,14.63 ACTUATOR1.GND 64.41,12.72 v67.5,15.81 | IC7.18 59.91,41.25 60.64,40.89 61.28,40.89 61.85,41.15 61.85,42.16 IC7.21 | 61.85,42.37 IC7.21 | IC7.25 | 61.85,42.6 IC7.21 | LED12.C 54.23,23.47 LED13.C | CON7.4 46.82,11.56 V8ZA2P-4.P$2 | 77.47,11.68 TIVA1.GND 79.38,14.4 | LED9.C 82.32,7.75 82.93,8.35 82.93,12.06 80.59,14.4 79.38,14.4 | 79.38,14.4 C30.2 79.38,16.61 LED8.C 82.17,19.94 81.17,21.52 | C23.- 79.76,26.09 C25.2 81.17,21.52 | C26.2 71.5,55.25 | 71.5,55.25 C27.2 | 71.5,55.25 73.66,52.7 74.3,52.7 75.4,52.75 76.34,51.05 IC4.7 76.33,48.12 76.01,47.82 v74.23,47.94 | v75.88,45.02 74.93,44.2 | 28.12,98.62 28.12,92.62 | 20.62,105.38 24,102 27.38,102 | 28.12,101.25 28.12,99 | 27.75,101.62 3.3V1.P$1 | C4.2 50.55,96.77 C5.2 48.7,98.62 47.62,98.62 | CON1.4 4.95,9.45 v4.95,6.48 5.65,5.71 10.54,5.71 v11.18,6.22 11.3,6.22 11.81,5.71 17.27,5.71 v17.78,6.22 18.03,6.22 18.48,5.71 22.92,5.71 v24.13,6.22 24.64,6.22 25.02,5.71 30.1,5.71 v30.48,6.22 | 59.25,79.88 57.09,82.74 C32.- | IC7.7 62.51,48.43 v60.39,47.82 | IC7.21 61.86,43.42 61.85,43.43 62.23,43.81 64.01,43.81 64.45,43.43 64.45,42.48 IC7.25 | IC7.25 IC7.26 | 64.51,40.37 64.46,40.83 IC7.25 | 83.62,5.78 83.62,4.57 81.98,2.1 66.44,2.1 64.41,2.73 63.91,2.88 63.26,3.05 61.85,3.05 57.47,3.05 56.58,3.68 56.58,4.89 55.12,6.35 V8ZA2P-3.P$2 | v77.79,21.65 81.03,21.65 81.17,21.52 | 79.66,65.3 79.66,60.88 78.58,59.42
  Top 0.61: LIPO_INPUT.P$1 8.76,105.79 14.99,105.79 15.58,105.2 FITPC.P$2 16,101.81 C16.2 15.3,97.85 C36.2 15.2,95.45 C37.2 16.28,91.71 C35.-
  Bottom 0.35: LIPO_FB.1 105.11,108 100.12,108 94.88,102.75 v94.81,95.32 108.75,81 108.75,75 106.5,72.75 106.12,72.75 RGBLED.1 | v57,36.75 57,39.75 64.35,47.1 66,48.75 66.75,48.75 68.25,47.25 68.25,39.25 | 68.25,39.25 68.25,37.88 69,37.12 70.12,37.12 75,42 | 75,42 75,44.49 v75.88,45.02 | 68.25,39.25 v64.32,39.25 | v75.57,67.12 75.57,72.5 78.38,75.38 U$1.P$12 | 37.88,106.5 v39,105.38 40.5,106.88 43.12,106.88 43.88,106.12 v51,106.12 | 27.75,102 3.3V1.P$1 | v46.12,67.35 46.12,63.38 28.88,46.12 25.5,46.12 1N4742.A | CON3.4 19.12,10.88 13.12,10.88 CON2.4 12.75,10.88 6.75,10.88 CON1.4 | 5V1.P$1 9,35.25 9,30.75 17.25,22.5 V8ZA2P-1.P$1 | 35.62,7.12 35.62,7.5 32.62,10.5 CON5.4 | 35.62,7.12 35.62,6.38 U2.4 | 35.62,7.12 39,10.5 CON6.4 39.38,10.5 42.75,7.12 | 42.75,7.12 42.75,7.5 45.75,10.5 CON7.4 | 42.75,7.12 42.75,6.38 U1.4 | v83.62,5.25 102.75,5.25 105.75,2.25 XB1.10 | 75,42 78,42 v84,36
  Bottom 0.406: V8ZA2P-4.P$2 V8ZA2P-3.P$2 | v74.23,47.94 v75.88,45.02 | 37.88,106.5 32.25,106.5 27.75,102 | v4.95,6.48 4.57,6.1 U7.4 | U6.4 v11.18,6.22 | U5.4 v17.78,6.22 | U4.4 v24.13,6.22 | v60.39,47.82 63.63,47.82 64.35,47.1 | U3.4 v30.48,6.22 | v67.5,15.81 67.5,16.7 71.18,20.38 76.52,20.38 v77.79,21.65
HX_RX  (via drill 0.8)
  Top 0.35: RX.2 5.25,19.88 5.25,22.88 4.88,23.25 4.88,24 6,25.12 6.75,25.12 7.88,24 7.88,16.88 7.12,16.12 7.12,14.25 3.35,11.75 3.48,4.72 6.38,3.35 CON1.1
  Top 0.406: v56.64,17.02 55.79,15.66 R45.1 | V8ZA2P-3.P$1 53.47,2.41 48.51,2.41 46.18,4.75 CON7.1 | v66.42,47.24 IC7.1
  Bottom 0.406: U7.5 6.05,5.08 CON1.1 6.43,4.75 6.73,4.45 8.99,4.45 U6.5 12.53,5.21 CON2.1 12.98,4.73 13.34,4.38 15.53,4.38 15.65,4.5 U5.5 18.88,5.21 CON3.1 19.33,4.73 19.68,4.25 22.36,4.25 22.5,4.31 U4.5 25.48,5.21 CON4.1 25.94,4.73 26.35,4.32 28.84,4.32 28.86,4.31 U3.5 31.83,5.21 CON5.1 32.29,4.73 32.64,4.38 35.28,4.38 35.33,4.43 U2.5 38.69,5.21 CON6.1 39.14,4.73 39.5,4.38 41.82,4.38 U1.5 45.55,5.21 CON7.1 | v66.42,47.24 58.42,39.24 58.42,34.92 56.58,33.72 v56.64,17.02 56.64,11.43 V8ZA2P-3.P$1
  Bottom 0.61: RX.2 8.05,22.15 V8ZA2P-1.P$2
HX_TX  (via drill 0.8)
  Top 0.35: CON5.2 32.62,6.75 39,6.75 CON6.2 39.38,6.75 45.75,6.75 CON7.2
  Top 0.406: CON7.2 48.55,6.7 V8ZA2P-4.P$1 51.69,4.06 53.21,8 53.21,13.25 R46.1 50.63,15.28 v48.9,17.02 | IC7.5 63.82,49.54 v63.82,51.44
  Bottom 0.35: 4.88,7.49 4.88,10.88 5.25,11.25 5.25,16.12 TX.2
  Bottom 0.406: U7.3 2.29,6.1 3.43,7.49 4.88,7.49 5.84,7.49 6,6.7 CON1.2 6.86,6.22 U6.3 9.42,7.37 11.81,7.37 12.48,6.7 CON2.2 13.46,6.22 U5.3 14.76,6.76 15.24,7.24 18.8,7.24 CON3.2 19.81,6.22 U4.3 22.25,7.37 24.64,7.37 25.05,6.7 CON4.2 27.36,6.7 U3.3 28.85,7.24 31.24,7.24 31.78,6.7 CON5.2 32.76,6.22 U2.3 | v63.82,51.44 61.98,53.09 56.77,53.09 55.94,50.86 55.37,24.7 54.99,25.15 50.67,25.15 48.9,23.37 v48.9,17.02 | U1.3 40.7,6.7 CON6.2
  Bottom 0.61: TX.2 7.54,18.47 V8ZA2P-2.P$2
LIPO_FB4  (via drill 0.8)
  Top 0.35: v73.88,100.5 73.5,100.5 72.38,99.38 R42.2 | v82.88,105.38 100.88,105.38 105.75,99.74 LIPO_FB.4
  Bottom 0.35: v73.88,100.5 73.88,104.25 75,105.38 v82.88,105.38
MOSFET_CTRL1
  Top 0.61: 10A.1 18.84,66.29 42.8,66.29 45.72,63.37 CSD8503KCS.3
MOSFET_CTRL2
  Top 0.35: PTCFUSE1.1 46.12,30.75 46.12,34.88 46.5,35.25 46.5,53.62 37.12,63 CSD8503KCS1.3
N$1
  Top 0.35: R39.1 67.88,105 67.88,106.88 68.25,107.25 C130.1 68.62,107.62 69.38,108.38 70.88,108.38 72,107.25 72,106.5 70.88,105.38 70.88,104.62 R14.2
N$2
  Top 0.35: 21.75,28.88 25.12,28.88 27,30.75 C12.+ 27.38,31.12 38.62,31.12 C13.+ | 21.75,28.88 19.12,28.88 C21.1 18.75,28.5 13.88,23.62 13.88,14.25 15.38,12.75 C1.1 | 21.75,28.88 21.75,37.12 F2.1
  Top 0.61: CON1.3 8.19,8.7 9.02,9.53 9.02,9.78 | 9.02,9.78 9.02,12.42 C17.1 | 9.02,9.78 10.1,8.7 CON2.3 14.54,8.7 15.62,9.78 | 15.62,9.78 15.62,12.57 C1.1 | 15.62,9.78 16.7,8.7 CON3.3 19.33,8.92 19.56,9.14 20.95,9.14 21.97,10.16 | 21.97,10.16 21.97,12.54 C2.1 | 21.97,10.16 23.43,8.7 CON4.3 25.94,8.79 26.04,8.89 27.3,8.89 28.45,10.03 | 28.45,10.03 28.45,12.56 C18.1 | 28.45,10.03 29.78,8.7 CON5.3 34.1,8.7 34.92,9.53 | 34.92,9.53 C19.1 | 34.92,9.53 35.75,8.7 CON6.3 39.31,8.7 39.5,8.89 40.89,8.89 42.04,10.03 | 42.04,10.03 42.04,12.43 C20.1 | CON7.3 46,8.73 45.97,8.76 43.31,8.76 42.04,10.03
N$3
  Top 0.61: C8.+ 25.88,87.66 IC5.1 21.61,96.81 D2.C
N$4  (via drill 0.8)
  Top 0.406: IC7.22 62.51,40.66 v61.21,39.18 | v65.6,40.39 R48.2
  Bottom 0.406: v65.6,40.39 64.07,40.64 62.31,40.64 61.32,39.84 61.24,39.77 v61.21,39.18
N$5
  Top 0.406: IC7.23 63.16,38.54 R47.2
N$6
  Top 0.406: LED24.C 62.36,34.13 R47.1
N$7  (1 unrouted)
  Top 0.406: L1.1 76.71,16 C30.1 76.07,15.88 74.3,14.1 74.3,11.89
N$8
  Top 0.406: R48.1 LED25.C
N$9
  Bottom 0.61: 20A.2 5.6,70.61 MAIN_PWR_SW.1
N$10  (via drill 0.8)
  Top 0.406: L1.2 76.71,22.1 C25.1 76.96,26.49 C23.+ 76.2,27.61 v76.2,29.72 | v76.52,39.56 75.82,40.45 75.04,41.55 IC4.20
  Bottom 0.406: v76.2,29.72 76.71,30.23 v76.52,39.56
N$11
  Top 0.406: IC4.15 71.79,40.35 74.04,38.16 73.98,18.41 72.33,15.3 69.79,14.61 68.71,13.46 68.71,3.56 69.28,2.98 74.3,2.98 76.26,4.64 76.26,9.97 75.84,10.45 TIVA1.D+
N$12
  Top 0.406: IC4.16 72.44,41.59 72.45,41.53 74.93,38.61 74.93,18.1 72.77,14.22 70.23,13.59 69.66,12.83 69.53,4.95 70.42,3.94 73.53,3.94 74.36,4.64 74.79,5.09 75.37,5.62 75.37,9.53 75.04,10.18 TIVA1.D-
N$13
  Top 0.406: LED3.C 80.9,34.52 R37.1
N$14
  Bottom 0.61: LIPO_INPUT.P$2 3.61,99.38 20A.1
N$15
  Top 0.406: LED4.C R38.1
N$16
  Top 0.406: IC4.23 76.99,41.51 77.6,41.15 79.12,41.15 80.71,39.43 80.71,38.51 R37.2
N$17
  Top 0.406: IC4.22 76.33,42.46 76.33,41.08 78.23,39.37 R38.2
N$18  (via drill 0.8)
  Top 0.35: v53.62,89.25 53.62,99.75 51.38,102 51,102 49.5,103.5 R24.1 | v75.38,58.5 v68.83,65.18 | LED2.5 89.62,83.25 90.38,83.25 91.5,82.12 91.5,81 95.25,77.25 105.75,77.25 RGBLED.4
  Top 0.406: v54.93,85.28 v54.74,80.77
  Bottom 0.35: v68.83,65.18 54.77,79.36 | v75.38,58.5 74.62,57.75 74.62,53.62 79.12,49.12 93.38,49.12 108.38,64.12 108.38,69.38 106.5,71.25 105.38,71.25 104.62,72 104.62,76.12 105.75,77.25 RGBLED.4
  Bottom 0.406: v53.62,89.25 54.36,88.52 v54.93,85.28 | v54.74,80.77 54.77,80.04 54.77,79.36
N$19
  Top 0.35: R27.2 63.38,99 66,99 R43.1
N$20  (via drill 0.8)
  Top 0.406: v97.66,66.61 97.66,55.69 92.84,50.42 89.79,50.42 v89.53,50.16 | v84.45,50.67 84.45,52.58 v81.22,54.04 | Q2.3 48.47,74.38 v47.75,73.85 | v54.36,67.82 58.42,67.75 v60.07,64.96 | v72.77,62.67 v76.96,58.93
  Bottom 0.406: BUZZER.- 95.05,73.35 97.66,70.74 v97.66,66.61 | v89.53,50.16 84.96,50.16 v84.45,50.67 | v81.22,54.04 81.15,54.8 v76.96,58.93 | v47.75,73.85 50.29,73.66 54.36,69.6 v54.36,67.82 | v60.07,64.96 61.72,62.42 64.64,58.36 70.61,57.02 72.58,62.42 v72.77,62.67
N$21
  Top 0.35: Q2.1 46.12,76.5 44.77,75.23 R28.1
N$22
  Top 0.406: R1.2 87.02,93.53 DTC114EET1G1-4.1
N$24
  Top 0.35: R17.2 96.75,92.62 97.88,91.5 98.7,91.5 98.94,92.37 LED19.C
N$25
  Top 0.35: DTC114EET1G1-4.3 91.5,92.62 94.5,92.62 R17.1
N$26  (via drill 0.8)
  Top 0.35: v91.5,90.75 91.12,90.38 90,90.38 DTC114EET1G1-5.1 | v87.38,88.5 87.38,89.62 86.62,90.38 R3.2
  Bottom 0.35: v91.5,90.75 89.62,90.75 v87.38,88.5
N$27  (via drill 0.8)
  Top 0.35: 49.12,106.12 49.12,106.88 R25.2 | 54.75,100.5 54.75,95.25 55.5,94.5 70.12,94.5 73.5,97.88 73.5,98.25 v77.62,102.38 | LED2.6 89.62,81.38 94.5,76.5 104.62,76.5 105.75,75.38 RGBLED.3
  Top 0.406: 54.75,100.5 49.12,106.12
  Bottom 0.35: v77.62,102.38 82.5,102.38 107.25,77.62 107.25,76.5 106.12,75.38 RGBLED.3
N$28  (via drill 0.8)
  Top 0.35: v51,100.5 49.12,100.5 R30.2 | LED2.4 89.25,84.75 88.5,84.75 87.75,84 87.75,80.62 92.62,75.75 103.88,75.75 105.75,73.88 RGBLED.2
  Bottom 0.35: v51,100.5 58.88,100.5 66.75,108.38 81.75,108.38 93.38,96.75 93.38,92.62 108,78 108,75.75 106.12,73.88 RGBLED.2
N$29
  Top 0.35: DTC114EET1G1-1.3 43.5,103.88 47.25,103.88 R24.2
N$30
  Top 0.35: DTC114EET1G1-2.3 43.5,107.25 47.25,107.25 R25.1
N$31
  Top 0.35: DTC114EET1G1-3.3 43.5,100.12 47.25,100.12 R30.1
N$32
  Top 0.35: R2.2 96.75,89.62 99.38,89.62 LED1.C
N$33
  Top 0.35: DTC114EET1G1-5.3 92.25,89.25 94.5,89.25 R2.1
N$34  (via drill 0.8)  (1 unrouted)
  Top 0.406: 70.36,53.09 70.36,48.01 v70.61,46.93 | v71.94,44.32 72.52,44.26 72.77,44.26 72.9,44.13 73.09,43.62 IC4.17
  Bottom 0.406: v70.61,46.93 70.99,46.29 v71.94,44.32
N$35
  Top 0.406: IC4.2 79.59,47.84 78.36,46.1 71.88,46.04 70.36,44.13 70.36,40.39 72.9,37.85 72.9,28.57 RST_FTDI_TIVA1.2
N$36
  Top 0.35: DTC114EET1G1-6.1 78,98.25 75.75,98.25 75.38,97.88 R5.2
N$37  (via drill 0.8)
  Top 0.35: v42.75,105.38 42,104.62 41.25,104.62 DTC114EET1G1-1.1 | v37.12,105 37.12,104.25 37.5,103.88 37.5,103.12 R31.2
  Bottom 0.35: v42.75,105.38 40.88,105.38 39.38,103.88
  Bottom 0.406: 39.38,103.88 38.25,103.88 v37.12,105
N$38
  Top 0.35: DTC114EET1G1-2.1 40.88,107.62 38.25,107.62 37.5,106.88 R32.2
N$39
  Top 0.35: DTC114EET1G1-3.1 40.88,100.5 38.25,100.5 37.5,99.75 R33.2
N$40
  Top 0.35: LED5.C 87,102.38 84,102.38 R4.2
N$41
  Top 0.35: DTC114EET1G1-6.3 79.12,100.88 80.25,100.88 81.75,102.38 R4.1
N$42
  Top 0.35: DTC114EET1G1-7.1 89.25,97.5 88.5,97.5 87,96 R7.2
N$43
  Top 0.35: R6.2 96.38,96.75 99,96.75 LED6.C
N$44
  Top 0.35: DTC114EET1G1-7.3 91.88,96.75 94.5,96.75 R6.1
N$53
  Top 0.35: R15.1 97.5,19.5 86.62,19.5 86.25,19.88 LED8.A
N$54
  Top 0.35: LED9.A 87.14,9.28 96.61,9.28 R16.1
N$55
  Top 0.35: R15.2 97.88,21.38 97.88,23.62 XB1.15
N$56
  Top 0.35: R16.2 97.88,5.62 97.88,2.25 XB1.6
N$70
  Top 0.35: PTCFUSE1.2 45.75,28.5 45,29.25 44.62,29.25 43.88,30 43.88,36.75 44.25,37.12 F2.2
N$73
  Top 0.406: R45.2 LED12.A
N$74
  Top 0.406: R46.2 51.05,17.11 LED13.A
N$76
  Top 0.61: R35.2 6.51,48.67 4.95,47.12 4.95,43.1 U$4.P4
N$92
  Top 0.406: ACTUATOR1.VBUS 61.21,14.92 61.98,15.68 C74.1 61.85,16.7 L2.1
N$93
  Top 0.406: L2.2 61.85,22.1 C24.1 61.65,22.81 C22.+ 61.65,26.98 62.41,26.98 64.26,27.94 66.29,27.94 67.31,29.84 67.31,32.26 68.07,33.02 68.07,38.92 67.18,39.81 67.18,44.07 66.55,44.7 61.59,44.7 61.21,44.32 61.21,43.12 IC7.20
N$94  (via drill 0.8)
  Top 0.406: IC7.15 57.96,40.47 58.93,39.56 58.95,24.95 58.95,24.34 58.29,23.62 58.29,15.49 56.58,13.78 56.58,9.21 56.64,8.83 56.71,8.83 v57.72,7.81 | 62.87,11.57 ACTUATOR1.D+ 62.8,11.06 v62.8,6.03
  Bottom 0.406: v57.72,7.81 57.72,5.21 58.67,4.25 61.21,4.25 v62.8,6.03
N$95  (via drill 0.8)
  Top 0.406: v59.82,14.48 59.94,40.13 58.61,41.15 IC7.16 | ACTUATOR1.D- 62.01,12.99 v62.67,13.91
  Bottom 0.406: v62.67,13.91 60.45,13.91 v59.82,14.48
N$115
  Top 0.406: C27.1 58.92,52.45 56.77,50.04 56.77,47.37 59.24,44.77 59.24,43.55 IC7.17
N$116
  Top 0.406: RST_ACTUATOR1.2 71.37,38.1 68.2,41.27 68.2,50.55 67.69,50.99 66.17,50.99 65.76,50.52 IC7.2
N$337
  Top 0.35: R42.1 70.5,99.38 67.88,99.38 R43.2
N$338
  Top 0.35: R40.2 72.38,102 75.38,102 80.25,106.88 102,106.88 105.56,102.43 LIPO_FB.3
N$378
  Top 0.61: FITPC.P$1 13.21,102.23 C16.1 13.21,95.95 C36.1 13.6,92.89 C37.1 13.5,88.71 C35.+ 14.45,86.92 10A.2
N$381
  Top 0.35: POWERLED4.A 8.62,66 8.38,65.91
  Top 0.61: R36.1 8.38,65.91
P2
  Bottom 0.35: FORCE_LEFT.1 106.5,28.12 99,28.12 73.88,53.25 73.88,60.75 82.88,69.75 82.88,73.88 81.38,75.38 U$1.P$2
P3  (via drill 0.8)
  Top 0.406: IC4.1 80.26,49.74 v80.26,51.69
  Bottom 0.406: v80.26,51.69 84.93,55.14 85.09,55.29 85.09,59.18 86.23,60.33 86.23,70.67 85.6,71.31 85.6,76.71 83.19,77.98 U$1.P$3
P4
  Top 0.406: U$1.P$4 82.8,80.52 83.76,79.63 83.76,61.53 77.85,54.8 77.64,54.59 IC4.5
P5  (via drill 0.8)
  Top 0.35: C14.1 58.88,96.38 58.88,98.62 R44.2 58.88,99 61.12,99 R27.1 61.12,98.62 v62.62,97.12 | v82.88,89.25 85.12,87 85.12,85.88 82.5,83.25 81.38,83.25 U$1.P$5
  Bottom 0.35: v82.88,89.25 82.88,96.38 82.12,97.12 v62.62,97.12
P6  (via drill 0.8)
  Top 0.35: 69.38,102 70.5,102 R40.1 | 69.38,102 67.88,102 R41.2 | v64.12,103.88 63,102.75 63,102 C15.1 | 69.38,102 69.38,105.75 v70.5,106.88
  Bottom 0.35: 68.62,103.88 v64.12,103.88 | 68.62,103.88 74.62,97.88 82.5,97.88 84.38,96 84.38,88.88 81.38,85.88 U$1.P$6 | v70.5,106.88 70.5,105.75 68.62,103.88
P7  (via drill 0.8)
  Top 0.35: 75.38,104.62 76.88,104.62 79.88,107.62 103.5,107.62 105.75,104.11 LIPO_FB.2 | 75.38,104.62 72.75,104.62 R14.1 | v83.62,86.25 83.25,86.25 81.38,88.12 U$1.P$7 | 75.38,104.62 v75.38,103.88
  Bottom 0.35: v83.62,86.25 83.62,87 85.12,88.5 85.12,96.38 80.62,100.88 77.25,100.88 75.38,102.75 v75.38,103.88
P8  (via drill 0.8)
  Top 0.35: U$1.P$8 81.38,90.75 84.75,90.75 R3.1 85.12,90.38 85.12,88.5 v86.62,87 | v102.38,85.5 107.62,90.75 107.62,91.88 LED.4 | v91.5,87.38 v100.5,87.38
  Bottom 0.35: v100.5,87.38 v102.38,85.5 | v91.5,87.38 88.12,87.38 87.75,87 v86.62,87
P9  (via drill 0.8)
  Top 0.406: U$1.P$9 81.41,93.09 R1.1 85.64,94.49 90.68,94.49 90.93,94.23 96.65,94.23 97.54,95.12 v101.47,95.12
  Bottom 0.406: v101.47,95.12 104.65,95.12 106.16,93.61 LED.3
P10
  Top 0.35: 84.38,96 81.38,96 U$1.P$10 | 84.38,96 84.75,96 R7.1 84.38,96 | 84.38,96 85.5,97.12 86.62,97.12 88.88,99.38 102.38,99.38 106.5,95.25 107.62,95.25 LED.2
P13  (via drill 0.8)
  Top 0.406: U$1.P$13 79.12,77.98 80.01,78.74 80.01,81.15 80.64,81.79 84.2,81.79 85.72,80.26 v87.57,74.68 | v92.46,65.22 94.61,60.45 93.47,58.8 87.88,51.56 v87.88,41.02
  Bottom 0.406: v87.57,74.68 v92.46,65.22 | v87.88,41.02 90.93,38.1 96.27,32.77 98.68,30.23 99.44,29.46 103.25,29.46 104.28,29.48 FORCE_LEFT.2
P14
  Bottom 0.35: FORCE_LEFT.3 106.88,30.75 107.25,30.75 108,30 108,27.75 105.38,25.12 85.12,25.12 61.88,1.88 54.38,1.88 52.5,3.75 52.5,7.12 37.12,22.5 37.12,24.75 30.75,31.12 19.88,31.12 16.12,34.88 16.12,59.62 22.12,65.62 22.12,89.25 29.62,96.75 29.62,97.5 31.12,99 58.88,99 77.25,80.62 78.38,80.62 U$1.P$14
P15  (via drill 0.8)
  Top 0.35: v91.12,32.25 106.5,32.25 FORCE_LEFT.4 | v48.38,54.75 v48.38,40.79 | v54,72.38 54,73.88 55.88,75.75 v55.88,79.88 | v75.38,80.62 76.12,80.62 78.38,82.88 U$1.P$15
  Bottom 0.35: v91.12,32.25 61.5,2.62 54.75,2.62 53.25,4.12 53.25,7.5 47.62,13.12 47.62,27 48.38,27.75 v48.38,40.79 | v48.38,54.75 55.5,61.88 55.5,70.88 v54,72.38 | v55.88,79.88 64.12,79.88 65.62,81.38 74.62,81.38 v75.38,80.62
P16  (via drill 0.8)
  Top 0.35: v13.12,24.75 13.12,25.5 v20.25,32.62 | v57.38,54.38 66.38,63.38 66.38,64.5 69,67.12 v69.75,67.12 | v69.75,77.64 78.38,85.5 U$1.P$16
  Bottom 0.35: v13.12,24.75 11.62,26.25 7.12,26.25 4.12,23.25 3.38,23.25 FORCE_RIGHT.1 | v20.25,32.62 33,32.62 46.88,46.5 46.88,47.62 53.62,54.38 v57.38,54.38 | v69.75,77.64 v69.75,67.12
P17  (via drill 0.8)
  Top 0.35: v21.75,44.25 13.12,44.25 11.62,42.75 11.62,36 9.38,33.75 8.62,33.75 7.5,32.62 7.5,28.5 3.75,24.75 3.38,24.75 FORCE_RIGHT.2 | v57.38,57.38 57.38,59.25 v68.13,69.69 | v68.19,77.62 78.38,88.12 U$1.P$17
  Bottom 0.35: v21.75,44.25 31.88,44.25 38.62,51 49.12,51 55.5,57.38 v57.38,57.38 | v68.19,77.62 v68.13,69.69
P18  (via drill 0.8)
  Top 0.35: v19.88,86.62 21.38,86.62 v24.38,89.62 | v71.62,84.38 72.38,84.38 78.38,90.38 U$1.P$18
  Bottom 0.35: v19.88,86.62 12.75,86.62 1.88,75.75 1.88,27.38 3,26.25 FORCE_RIGHT.3 | v24.38,89.62 24.38,90.38 30.38,96.38 30.38,97.12 31.5,98.25 57.75,98.25 v71.62,84.38
P19  (via drill 0.8)
  Top 0.35: v23.62,73.88 v19.88,73.88 | v51,69.38 65.62,69.38 v66,69.75 | v66,79.88 66,80.62 78.38,93 U$1.P$19
  Bottom 0.35: v19.88,73.88 10.5,64.5 10.5,58.88 7.5,55.88 7.5,33.75 3.38,29.62 3.38,28.12 FORCE_RIGHT.4 | v23.62,73.88 23.62,69.38 23.25,69 23.25,68.25 24.38,67.12 25.12,67.12 27.38,69.38 v51,69.38 | v66,79.88 v66,69.75
P20  (via drill 0.8)
  Top 0.35: v73.12,95.62 75,95.62 R5.1 | v99.75,100.88 89.25,100.88 86.25,97.88 81.75,97.88 81,97.12 80.25,97.12 78.75,95.62 U$1.P$20
  Bottom 0.35: v73.12,95.62 78.38,95.62 U$1.P$20 | v99.75,100.88 103.88,96.75 107.62,96.75 LED.1
P21
  Top 0.35: R21.2 37.88,69.75 37.88,72.75 U$1.P$21
  Bottom 0.35: 53.24,68.88 49.5,72.75 38.25,72.75 U$1.P$21
  Bottom 0.406: 53.24,68.88 53.28,68.4 53.28,66.1 53.85,65.66 CSD8503KCS.1
P22
  Top 0.35: U$1.P$22 38.25,75.38 39.75,73.88 39.75,69.38 38.25,67.88 29.62,67.88 27.38,70.12 18.75,70.12 11.25,62.62 11.25,61.12 13.12,59.25 17.25,59.25 26.25,50.25 30.38,50.25 PIN22.1
P23
  Top 0.35: R28.2 40.87,75.23 39.5,76.5 38.25,77.62 U$1.P$23
P24
  Top 0.406: Q1.2 47.92,78.78 46.8,77.92 42.31,77.92 R23.1 40.78,77.84 U$1.P$24
P25
  Top 0.35: Q5.3 46.5,85.93 45.01,86.41 44.26,86.41 42.51,86.38 41.24,84.3 R26.1 40.87,83.23 39.75,83.25 38.25,83.25 U$1.P$25
P28  (via drill 0.8)
  Top 0.35: R11.1 40.22,90.62 38.5,90.62 U$1.P$28 | v75.93,56.81 74.68,57.13 v69.84,58.47
  Top 0.406: R11.1 41.19,89.69 41.34,89.28 C6.1
  Bottom 0.35: v75.93,56.81 78.09,52.93 79.5,49.88 81,49.88 101.32,64.48 104.02,64.48 SW1.3 | 43.5,85.25 38.25,90.38 U$1.P$28
  Bottom 0.406: 43.5,85.25 43.82,84.83 45.28,83.57 48.5,83.57 49.27,82.86 49.73,82.42 61.09,71.06 61.09,65.6 61.34,64.96 65.02,59.69 67.31,59.12 v69.84,58.47
P29  (via drill 0.8)
  Top 0.35: R10.1 40.6,93.38 38.25,93.38 U$1.P$29 | v44.86,91.87 46.63,91.86 47.12,91.86 C4.1
  Top 0.406: C4.1 47.62,92.96 v47.62,93.85 | v61.28,81.28 61.09,77.72 v60.96,77.6 | v63.88,72.39 v72.33,72.39 | v72.71,64.9 72.71,64.26 v76.71,60.71 | v83.57,56.33 v86.93,59.12
  Bottom 0.35: v44.86,91.87 39.25,91.87 38.25,93 U$1.P$29
  Bottom 0.406: v47.62,93.85 52.96,93.73 56.64,90.55 56.52,86.93 v61.28,81.28 | v60.96,77.6 60.96,76.45 v63.88,72.39 | v72.71,64.9 71.82,65.66 71.82,71.88 v72.33,72.39 | v76.71,60.71 78.61,60.71 82.49,56.83 v83.57,56.33 | v86.93,59.12 95.06,65.6 103.71,65.6 SW1.2
P30  (via drill 0.8)
  Top 0.35: U$1.P$30 38.25,96 40.73,96 43.06,97.63 45,97.5 45.99,96.51 47.12,96.51 C5.1
  Top 0.406: C5.1 47.62,96.4 v48.9,95.06 | v70.74,82.55 70.29,82.04 v68.58,80.14 | v74.49,64.45 76.83,62.42 v78.04,62.1 | v83.25,58.99 85.98,62.55 86.74,66.29 89.79,69.34 v101.85,69.34 | R9.1 41.06,95.67 40.73,96
  Bottom 0.406: v48.9,95.06 53.72,95.06 56.01,92.46 60.83,92.46 v70.74,82.55 | v68.58,80.14 74.49,76.01 v74.49,64.45 | v78.04,62.1 80.64,60.64 82.3,59.88 v83.25,58.99 | v101.85,69.34 102.27,68.92 SW1.1
P33  (via drill 0.8)
  Top 0.35: R13.2 31.88,77.62 35.25,77.62 U$1.P$33 | v27.75,67.88 25.5,67.88 v24.75,68.62
  Bottom 0.35: v27.75,67.88 38.25,67.88 42,64.12 42,63.38 CSD8503KCS1.1 | v24.75,68.62 25.5,68.62 34.5,77.62 35.25,77.62 U$1.P$33
P34  (via drill 0.8)
  Top 0.35: R12.1 31.12,72.75 27.75,72.75 C7.1 27.38,72.38 25.88,72.38 | v84,22.12 84,34.12 106.88,57 106.88,64.12 SW1.4 | v63.75,1.88 54.38,1.88 54,1.5 47.62,1.5 v47.25,1.88 | v22.88,27.38 v21,25.5 | 25.88,72.38 v20.62,72.38 | 25.88,72.38 25.88,82.88 28.88,85.88 33.38,85.88 33.75,85.5 33.75,82.88 35.25,81.38 35.25,80.62 U$1.P$34
  Bottom 0.35: v63.75,1.88 v84,22.12 | v47.25,1.88 47.25,11.25 35.62,22.88 23.62,22.88 v21,25.5 | v22.88,27.38 19.88,30.38 19.5,30.38 14.62,35.25 14.62,53.62 11.25,57 11.25,63 v20.62,72.38
P35  (via drill 0.8)
  Top 0.406: RST_FTDI_TIVA1.1 RST_ACTUATOR1.1 69.47,31.24 v69.47,38.35
  Bottom 0.406: v69.47,38.35 69.47,51.31 68.39,52.39 64.2,52.39 57.78,58.8 57.78,72.9 49.02,81.85 35.94,81.85 35.56,82.04 U$1.P$35
P38
  Top 0.35: 35.62,102 35.62,102.75 R31.1 | 34.12,91.88 35.25,90.75 U$1.P$38
  Top 0.406: 35.62,102 34.12,100.5 34.12,91.88
P39  (via drill 0.8)
  Top 0.35: 32.99,102.75 35.62,105 35.62,106.5 R32.1 | v32.62,95.25 32.99,96
  Top 0.406: 32.99,96 32.99,102.75
  Bottom 0.35: v32.62,95.25 33.38,95.25 35.25,93.38 U$1.P$39
P40
  Top 0.35: R33.1 35.62,99.38 35.62,96 U$1.P$40
RX3  (via drill 0.8)
  Top 0.406: U$1.P$26 40.7,85.6 41.72,87.31 45.78,87.31 48.32,86.04 v48.32,85.47 | v59.63,81.15 60.01,81.72 60.96,82.87 61.53,82.87 62.42,81.92 v62.42,77.28 | v73.34,74.23 72.52,73.41 65.28,73.41 v64.58,74.11 | v78.36,63.5 77.09,63.5 73.6,66.8 73.53,66.86 v73.34,67.37 | v80.96,62.42 81.47,60.39 v79.44,58.36 | v82.49,55.24 85.79,53.21 85.79,47.5 85.72,47.43 85.72,38.29 v84.52,37.85 | v87.25,26.42 87.25,25.4 86.17,23.94 86.55,23.5 v88.33,21.72 | v90.17,6.35 90.17,2.27 XB1.2
  Bottom 0.406: v48.32,85.47 48.64,85.03 49.02,84.33 55.05,81.79 57.66,81.15 v59.63,81.15 | v62.42,77.28 63.82,75.18 v64.58,74.11 | v78.36,63.5 v80.96,62.42 | v79.44,58.36 80.33,57.59 82.3,55.5 v82.49,55.24 | v84.52,37.85 85.72,33.72 92.2,33.72 99.19,26.73 87.57,26.73 v87.25,26.42 | v88.33,21.72 88.33,16.38 88.71,16 88.71,7.81 v90.17,6.35 | v73.34,74.23 v73.34,67.37
TIVA_RX  (via drill 0.8)
  Top 0.35: Q1.3 47.25,81 49.12,81 50.25,79.88 R22.1 50.62,79.88 v50.62,78 | v36.38,51.75 35.62,51.75 24.38,40.5 21,40.5 17.62,37.12 17.62,31.12 v11.25,24.75 | v6.38,23.62 6.38,21 7.12,20.25 7.12,18.75 6.38,18 4.5,18 3,16.5 TX.1
  Bottom 0.35: v50.62,78 51.38,78 57,72.38 57,60.38 48.38,51.75 v36.38,51.75 | v11.25,24.75 7.5,24.75 v6.38,23.62
TIVA_TX  (via drill 0.8)
  Top 0.35: Q5.2 48.63,82.98 49.37,83.75 50.12,84.5 R29.1 50.5,85.12 50.62,85.5 51.38,86.25 53.25,86.25 53.62,85.88 53.62,75.38 v52.88,74.62 | v45,53.25 45,42 40.12,37.12 40.12,28.5 37.5,25.88 23.25,25.88 v19.12,21.75
  Bottom 0.35: v52.88,74.62 53.62,74.62 56.25,72 56.25,60.75 48.75,53.25 v45,53.25 | v19.12,21.75 18,20.62 13.5,20.62 10.5,23.62 8.25,23.62 6,21.38 4.5,21.38 3,19.88 RX.1
TX3  (via drill 0.8)
  Top 0.406: U$1.P$27 38.8,88.2 45.85,88.27 v47.94,87.57 | v58.8,82.36 58.74,82.36 60.07,83.88 62.17,83.88 64.14,81.92 64.14,77.34 65.09,76.39 v71.69,76.39 | v67.75,60.96 v67.82,56.39 | v71.94,47.43 73.53,46.93 76.64,46.93 v77.15,47.31 | v87,35.37 87,29.84 86.55,29.27 85.28,27.69 84.96,27.24 84.96,23.05 v85.66,22.35 | v87.82,6.67 88.58,5.46 v88.58,3.62
  Bottom 0.406: v47.94,87.57 49.21,85.98 50.23,84.96 52.96,84.96 55.12,82.8 58.17,82.8 v58.8,82.36 | v71.69,76.39 71.75,74.87 70.87,73.98 70.87,64.07 69.47,62.67 69.47,61.78 v67.75,60.96 | v67.82,56.39 67.82,54.55 68.26,54.1 70.23,54.1 72.45,51.88 72.45,48.45 v71.94,47.43 | v77.15,47.31 79.82,44.2 80.07,44.2 81.41,42.86 81.41,41.53 83.88,39.05 84.9,39.05 86.55,37.4 86.55,36.51 v87,35.37 | v85.66,22.35 85.66,9.14 v87.82,6.67 | v88.58,3.62 88.71,3.49 91.31,3.49 91.78,3.03 XB1.3
VCC
  Top 0.35: CSD8503KCS1.2 40.12,63 40.88,62.25 40.88,61.88 42,60.75 49.12,60.75 51.38,63 CSD8503KCS.2
  Top 0.61: U$4.P2 6.79,53.74 R36.2 6.67,52.25 7.87,51.05 11.17,51.05 C3.1 15.17,54.8 17.4,54.74 | 17.4,54.74 17.43,54.77 | 17.53,54.86 17.43,54.77 | 17.43,54.77 C9.+ | 1N4742.C 17.4,46.13 17.4,54.74
  Bottom 0.35: CSD8503KCS1.2 39.75,63 22.88,46.12 18,46.12 1N4742.C
  Bottom 0.61: MAIN_PWR_SW.2 4.84,65.01 7.11,62.74 7.11,57.95 U$4.P2